# Altium PCB PCB1.PcbDoc
Units mm, origin at the board's own origin, x right, y up, seen from the top; angles counter-clockwise.
Board outline 57.28 x 19.43 mm, 2 copper layers (Top Layer, Bottom Layer); 8 components, 7 nets, 31 pads, 0 vias.
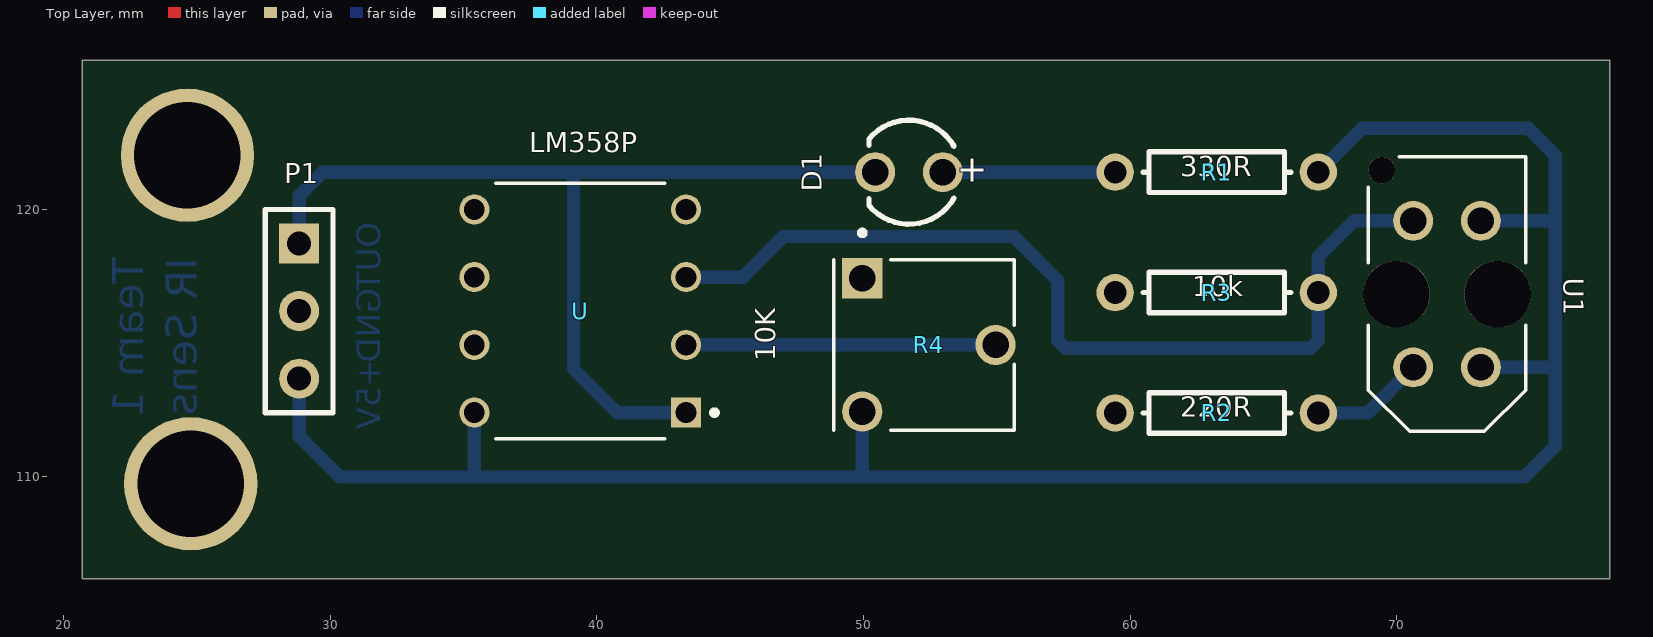
[diagram p0: Top Layer view]
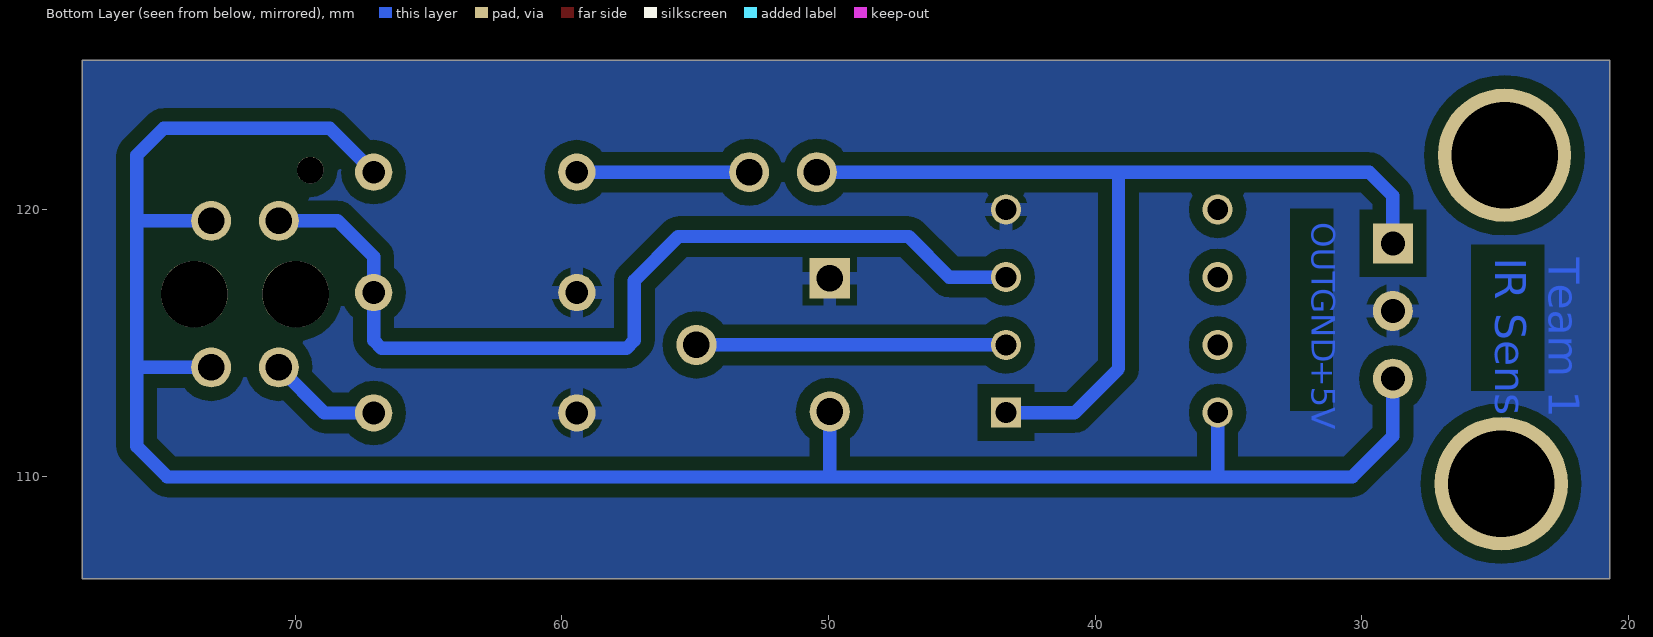
[diagram p1: Bottom Layer view, seen from below]
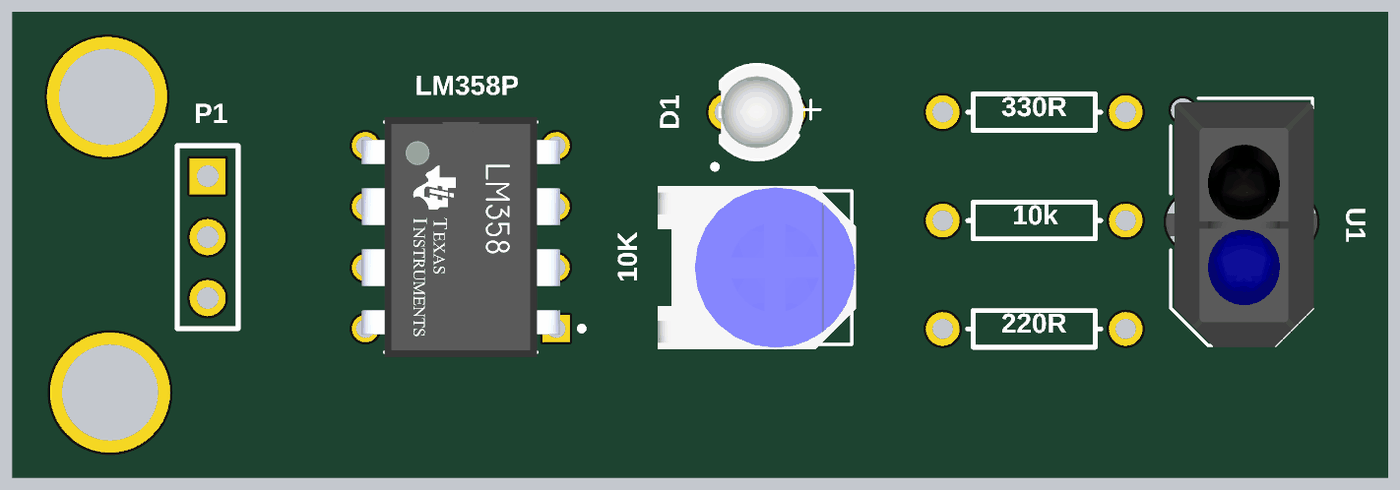
[diagram p2: 3D render of the assembled board from above, using the file's embedded part models]

## Layer stack, top to bottom
Top Solder: solder mask 0.0102, Solder Resist, Dk 3.5
Top Layer: signal copper 0.0356
Dielectric 1: dielectric 0.32, FR-4, Dk 4.8
Bottom Layer: signal copper 0.0356
Bottom Solder: solder mask 0.0102, Solder Resist, Dk 3.5

## Board outline
20.701,106.172 77.978,106.172 77.978,125.603 20.701,125.603

## Design rules (kind name [scope] priority, off if disabled: settings)
Clearance poly [InNamedPolygon('NONET_L01_P000')] p1: gap=0.5 ignorepadtopadclearanceinfootprint=FALSE
Clearance [All] p2: gap=0.5 ignorepadtopadclearanceinfootprint=FALSE
Height [All] p1: minheight=0 maxheight=12 prefheight=5
PolygonConnect [All] p1: connectstyle=Relief reliefconductorwidth=0.5 reliefentries=4 polygonreliefangle="90 Angle" airgapwidth=0.254
RoutingLayers [All] p1: top layer_v5=FALSE bottom layer_v5=TRUE
RoutingVias [All] p1: holewidth=0.711 width=1.27 viastyle="Through Hole" minholewidth=0.711 minwidth=1.27 maxholewidth=0.711 maxwidth=1.27
SolderMaskExpansion [All] p1: expansion=0.102 istentingtop=FALSE
UnRoutedNet [All] p1: checkbadconnections=TRUE
Width [All] p1: maxlimit=0.5 minlimit=0.5 preferedwidth=0.5
27 further rules are at their usual default settings.

## Components (designator, comment, footprint, x,y, rotation, side; value= is the part's Value field where it differs from the comment)
D1 "15400385A3590" WL-TIRW_D3.9H5.3 51.701,121.412 r180 top
P1 "Header 3" HDR1X3 28.829,118.745 r270 top
R1 "330R" AXIAL-0.3 63.246,121.412 r0 top
R2 "220R" AXIAL-0.3 63.246,112.381 r0 top
R3 "10k" AXIAL-0.3 63.246,116.896 r0 top
R4 "10K" TRIM_EVN-D8AA03B14 52.451,114.935 r270 top
U "LM358P" DIP794W45P254L959H508Q8 39.37,116.205 r180 top
U1 "TCRT5000" OPTO_TCRT5000 71.882,116.84 r270 top

## Footprints (in the part's own frame and the unit in brackets; to place one, negate y for a bottom-side part, rotate by r counter-clockwise, add the part's x,y. Pads: shape width x height; smd on the part's side, far side on the other; paste and mask are expansions set on the pad)
AXIAL-0.3 [mm] "Axial Device, Thru-Hole; 2 Leads; 0.3 in Pin Spacing"
  round 1.4 hole 0.85: 1(-3.81,0) 2(3.81,0)
  silkscreen extent -2.77,-0.76 2.77,0.76
DIP794W45P254L959H508Q8 [mm]
  rect 1.13x1.13 hole 0.78: 1(-3.97,3.81)
  round 1.13 hole 0.78: 2(-3.97,1.27) 3(-3.97,-1.27) 4(-3.97,-3.81) 5(3.97,-3.81) 6(3.97,-1.27) 7(3.97,1.27) 8(3.97,3.81)
  silkscreen extent -5.13,-4.79 3.18,4.79, body extent -4.13,-5 4.13,5, height 6.1
HDR1X3 [mm] "Connector; Header; 3 Position"
  rect 1.5x1.5 hole 0.9: 1(0,0)
  round 1.5 hole 0.9: 2(2.54,0) 3(5.08,0)
  silkscreen extent -1.27,-1.27 6.35,1.27
OPTO_TCRT5000 [mm]
  round 1.5 hole 1: A(2.75,1.27) CATH(2.75,-1.27) COLL(-2.75,1.27) E(-2.75,-1.27)
  round 1 hole 1 unplated: ""(-4.65,-2.45)
  round 2.5 hole 2.5 unplated: ""(0,1.9) ""(0,-1.9)
  silkscreen extent -5.15,-2.95 5.15,2.95, body extent -4.97,-3.3 5.23,3.5, height 6.72
TRIM_EVN-D8AA03B14 [mm]
  rect 1.508x1.508 hole 1: 1(-2.5,-2.5)
  round 1.508 hole 1: 2(0,2.5) 3(2.5,-2.5)
  silkscreen extent -4.3,-3.57 3.2,3.2, body extent -3.4,-4.88 3.41,3.38, height 9.62
WL-TIRW_D3.9H5.3 [mm] "THT Infrared Round Waterclear, body diameter 3.9mm"
  round 1.5 hole 1: 1(1.27,0) 2(-1.27,0)
  silkscreen extent -1.69,-1.95 1.5,1.95, body extent -1.95,-1.95 1.62,1.95, height 5.33

## Part data
D1: "WL-TIRW THT Infrared Round Waterclear, D3.9H5.3, 60mW/sr, 1.5V, 35deg", Emitting color=Infrared, Forward Voltage=1.5V, Manufacturer="Wurth Elektronik", Operating Temperature="-40 to +85degC", Centroid Wavelength=845nm, Chip Technology=AlGaAs, ComponentLink1Description=Manufacturer, ComponentLink1URL=http://www.we-online.de, ComponentLink2Description=Datasheet, ComponentLink2URL=https://www.we-online.com/catalog/datasheet/15400385A3590.pdf, Manufacturer Part Number=15400385A3590, Mounting Technology=THT, Packaging=Bulk, Peak Wavelength=850nm, Published Date="August 2020", Radiant Intensity typ.=60mW/sr, Size=D3.9H5.3, Viewing Angle=35deg
P1: "Header, 3-Pin", LatestRevisionDate=17-Jul-2002, LatestRevisionNote="Re-released for DXP Platform.", Publisher="Altium Limited"
R1 R2 R3: library part Res1, "Resistor", LatestRevisionDate=17-Jul-2002, LatestRevisionNote="Re-released for DXP Platform.", PackageDescription="Axial Device, Thru-Hole; 2 Leads; 0.3 in Pin Spacing", PackageReference=AXIAL-0.3, Published=8-Jun-2000, Publisher="Altium Limited"
R4: library part EVN-D8AA03B14, "10 kOhms 0.1W, 1/10W PC Pins Through Hole Trimmer Potentiometer Carbon 1 Turn Top Adjustment", Package="PQFP-44 Panasonic", Availability=Unavailable, MF="Panasonic Electronic", MP=EVN-D8AA03B14, Price=None, SnapEDA_Link=https://www.snapeda.com/parts/EVN-D8AA03B14/Panasonic%20Electronic%20Components/view-part/1534925/?ref=snap
U: "Dual Operational Amplifiers", Package="PDIP-8 Texas Instruments", Arrow_Electronics-Purchase-URL=https://snapeda.com/shop?store=Arrow+Electronics&id=559457, Availability=Unavailable, DigiKey-Purchase-URL=https://snapeda.com/shop?store=DigiKey&id=559457, MF="Texas Instruments", Mouser-Purchase-URL=https://snapeda.com/shop?store=Mouser&id=559457, MP=LM358P, Price=None, SnapEDA_Link=https://www.snapeda.com/parts/LM358P/Texas%20Instruments/view-part/559457/?ref=snap, Texas_Instruments-Purchase-URL=https://snapeda.com/shop?store=Texas+Instruments&id=559457
U1: "Reflective Optical Sensor 0.591 _15mm_ PCB Mount", Package="PCB Mount Vishay", Availability=Unavailable, MF=Vishay, MP=TCRT5000, Price=None, SnapEDA_Link=https://www.snapeda.com/parts/TCRT5000/Vishay%20Semiconductor%20Opto%20Division/view-part/885229/?ref=snap

## Free pads (board coordinates)
  round 5 hole 4 unplated: ""(24.638,122.047) ""(24.765,109.728)

## Nets (pads, with @x,y where several pads share a name; then routed paths per layer and width w, separated by ;. In a path a pad name is that pad's centre, name@x,y a point inside that pad or via, vN(x,y) a via of type N, cw(c..) or ccw(c..) an arc to the next point about the centre after c; other vN are vias at no path point)
+5: P1.3 R1.2 R4.3 U1.A U1.COLL U.8 | length 81.8
  Bottom Layer w0.5: P1.3 28.829,111.506 30.353,109.982 35.433,109.982 ; U.8 35.4,110.015 35.433,109.982 ; R4.3 49.951,110.069 50.038,109.982 ; R1.2 68.707,123.063 74.93,123.063 75.946,122.047 75.946,119.634 ; U1.A 75.902,114.09 75.946,114.046 ; U1.COLL 75.902,119.59 75.946,119.634 ; 35.433,109.982 50.038,109.982 ; 50.038,109.982 74.803,109.982 75.946,111.125 75.946,114.046 ; 75.946,114.046 75.946,119.634
GND: P1.2 R2.1 R3.1 R4.1 U.4
NetD1_2: D1.2 R1.1 | length 6.1
  Bottom Layer w0.5: D1.2@53.34,121.412 R1.1
NetR2_2: R2.2 U1.CATH | length 4.3
  Bottom Layer w0.5: R2.2 68.903,112.381 U1.CATH
NetR3_2: R3.2 U1.E U.3 | length 34.8
  Bottom Layer w0.5: U.3 45.466,117.475 46.99,118.999 55.626,118.999 57.277,117.348 57.277,115.101 57.57,114.808 66.763,114.808 67.056,115.101 R3.2 67.056,118.237 68.409,119.59 U1.E
NetR4_2: R4.2 U.2 | length 11.6
  Bottom Layer w0.5: U.2 R4.2
out: D1.1 P1.1 U.1 | length 36.4
  Bottom Layer w0.5: P1.1 28.829,120.523 29.718,121.412 39.116,121.412 ; U.1 40.767,112.395 39.116,114.046 39.116,121.412 ; D1.1@50.8,121.412 39.116,121.412
pads on no net: U1. U.5 U.6 U.7

## Polygon pours and split planes (outlines as drawn)
GND on Bottom Layer "GND_L02_P001" (solid, remove dead copper, pour order 1): 20.701,106.172 77.978,106.172 77.978,125.603 20.701,125.603

## Other copper
Bottom Layer:
  text "OUT" at 32.171,119.543 h1.52 r90
  text "Team 1 / IR Sensor" at 25.38,118.195 h2 r90
  text "GND" at 32.171,117.052 h1.52 r90
  text "+5V" at 32.167,114.371 h1.52 r90

## Text inside footprints (layer, text, board x,y; h text height)
D1: Top Overlay "+" at 54.651,121.912 h1.02 r180